# Altium PCB 600米舵机电容板V1.0.PcbDoc
Units mm, origin at the board's own origin, x right, y up, seen from the top; angles counter-clockwise.
Board outline 21.34 x 23.24 mm, 2 copper layers (Top Layer, Bottom Layer); 20 components, 2 nets, 46 pads, 29 vias.
Unrouted connection lines stored in the file: 18.
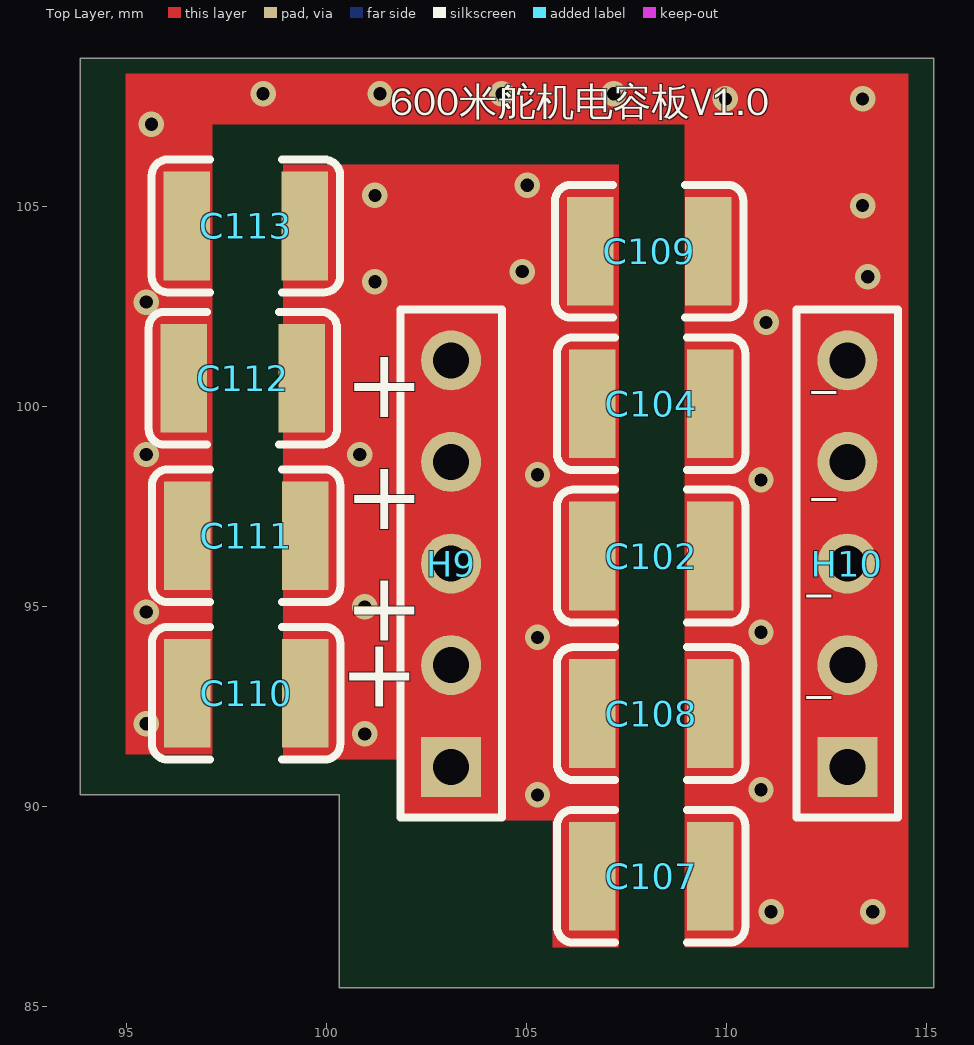
[diagram p0: Top Layer view]
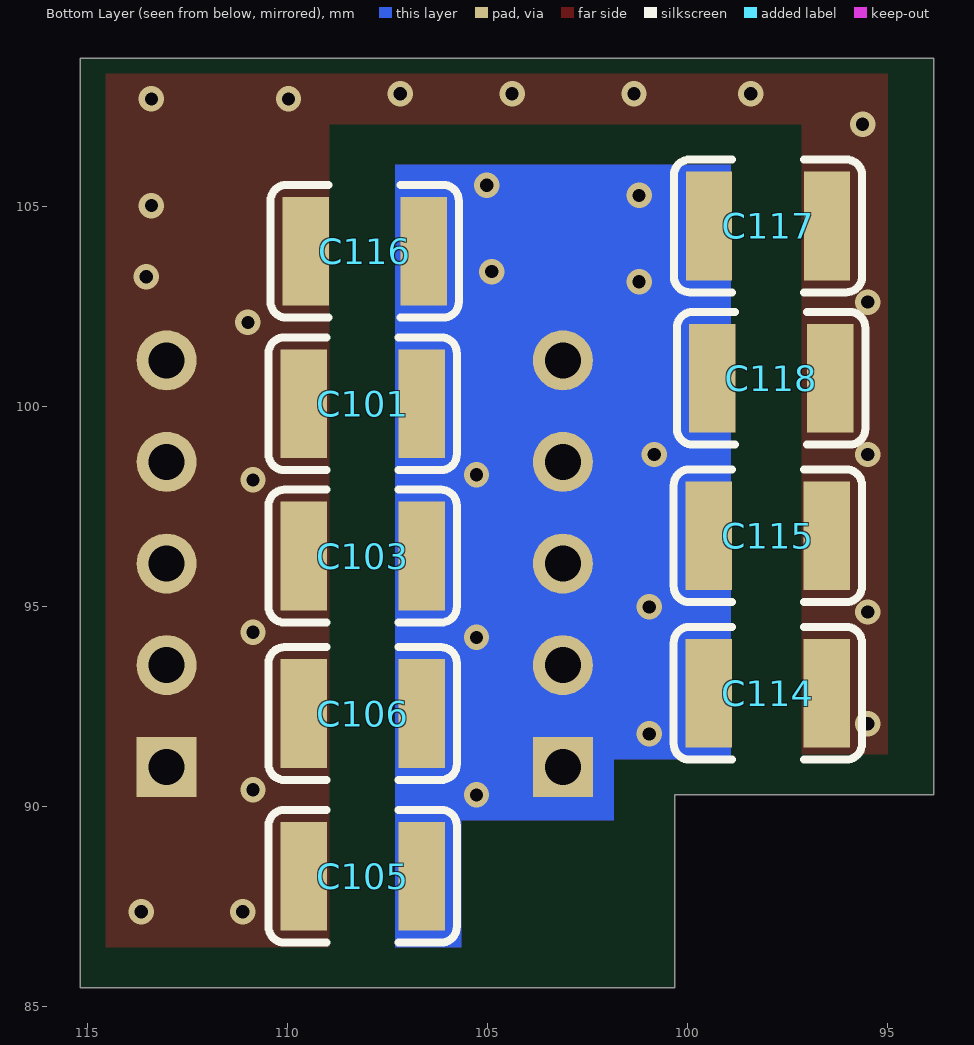
[diagram p1: Bottom Layer view, seen from below]

## Layer stack, top to bottom
Top Solder: solder mask 0.0102, Solder Resist, Dk 3.5
Top Layer: signal copper 0.0356
Dielectric 1: dielectric 0.32, FR-4, Dk 4.8
Bottom Layer: signal copper 0.0356
Bottom Solder: solder mask 0.0102, Solder Resist, Dk 3.5

## Board outline
93.853,90.297 100.33,90.297 100.33,85.471 115.189,85.471 115.189,108.712 93.853,108.712

## Design rules (kind name [scope] priority, off if disabled: settings)
Clearance 48V [(InNamedPolygon('Bottom0V') OR InNamedPolygon('BottomEncgnd') OR InNamedPolygon('Top0V') OR InNamedPolygon('TopEncgnd')) vs (InNet('24V') OR InNet('DC+') OR InNet('NetD1_1') OR InNet('NetF1_1'))] p1: gap=1.27 ignorepadtopadclearanceinfootprint=FALSE
Clearance Clearance_1 [HasFootprint('HDR-TH_40P-P1.27-V-M-R2-C20-S1.27-ISMC')] p2: gap=0.127 ignorepadtopadclearanceinfootprint=FALSE
Clearance tssop14 [HasFootprint('TSSOP-14_L5.0-W4.5-P0.65-LS6.4-BL')] p3: gap=0.01 ignorepadtopadclearanceinfootprint=TRUE
Clearance [All] p4: gap=0.254 ignorepadtopadclearanceinfootprint=FALSE
PlaneConnect [All] p1: planeconnectstyle=Direct reliefexpansion=0.508 reliefentries=4 reliefconductorwidth=0.254 reliefairgap=0.254
PolygonConnect [All] p1: connectstyle=Direct reliefconductorwidth=0.254 reliefentries=4 polygonreliefangle="90 Angle" airgapwidth=0.254
RoutingVias [All] p1: holewidth=0.711 width=1.27 viastyle="Through Hole" minholewidth=0.711 minwidth=1.27 maxholewidth=0.711 maxwidth=1.27
SolderMaskExpansion [All] p1: expansion=0.102 istentingtop=FALSE
SupplyNets "Schematic Supply Nets_9" [InNet('DC+')] p1: voltage=0.000
SupplyNets "Schematic Supply Nets_7" [InNet('0V')] p2: voltage=0.000
Width 5mil [(InNet('Encoder_5V') OR InNet('Encoder_GND') OR InNet('Encoder_CLK+') OR InNet('Encoder_CLK-') OR InNet('Encoder_D+') OR InNet('Encoder_D-') OR InNet('DI_RET') OR InNet('USB_D+') OR InNet('USB_D-') OR InNet('USB_VBUS') OR InNet('USB_GND'))] p1: maxlimit=0.762 minlimit=0.127 preferedwidth=0.127
Width Width_1 [All] p2: maxlimit=7.62 minlimit=0.254 preferedwidth=0.254
29 further rules are at their usual default settings.

## Components (designator, comment, footprint, x,y, rotation, side; value= is the part's Value field where it differs from the comment)
C101 "4.7uf 100V" 1210_C 108.127,100.076 r180 bottom value=4.7uF
C102 "4.7uf 100V" 1210_C 108.127,96.266 r180 top value=4.7uF
C103 "4.7uf 100V" 1210_C 108.127,96.266 r180 bottom value=4.7uF
C104 "4.7uf 100V" 1210_C 108.127,100.076 r180 top value=4.7uF
C105 "4.7uf 100V" 1210_C 108.127,88.265 r180 bottom value=4.7uF
C106 "4.7uf 100V" 1210_C 108.127,92.329 r180 bottom value=4.7uF
C107 "4.7uf 100V" 1210_C 108.127,88.265 r180 top value=4.7uF
C108 "4.7uf 100V" 1210_C 108.127,92.329 r180 top value=4.7uF
C109 "4.7uf 100V" 1210_C 108.077,103.886 r180 top value=4.7uF
C110 "4.7uf 100V" 1210_C 98,92.837 r0 top value=4.7uF
C111 "4.7uf 100V" 1210_C 98,96.774 r0 top value=4.7uF
C112 "4.7uf 100V" 1210_C 97.917,100.711 r0 top value=4.7uF
C113 "4.7uf 100V" 1210_C 97.995,104.521 r0 top value=4.7uF
C114 "4.7uf 100V" 1210_C 98,92.837 r0 bottom value=4.7uF
C115 "4.7uf 100V" 1210_C 98,96.774 r0 bottom value=4.7uF
C116 "4.7uf 100V" 1210_C 108.077,103.886 r180 bottom value=4.7uF
C117 "4.7uf 100V" 1210_C 97.995,104.521 r0 bottom value=4.7uF
C118 "4.7uf 100V" 1210_C 97.917,100.711 r0 bottom value=4.7uF
H9 "1×6插针 2.54" HDR1X5 103.124,91 r90 top locked
H10 "1×6插针 2.54" HDR1X5 113.03,91 r90 top locked

## Footprints (in the part's own frame and the unit in brackets; to place one, negate y for a bottom-side part, rotate by r counter-clockwise, add the part's x,y. Pads: shape width x height; smd on the part's side, far side on the other; paste and mask are expansions set on the pad)
1210_C [mm]
  rect 1.16x2.72 smd: 1(-1.475,0) 2(1.475,0)
  silkscreen extent -2.36,-1.66 2.35,1.66, body extent -1.6,-1.25 1.6,1.25, height 1.3
HDR1X5 [mm] "Connector; Header; 5 Position"
  rect 1.5x1.5 hole 0.9: 1(0,0)
  round 1.5 hole 0.9: 2(2.54,0) 3(5.08,0) 4(7.62,0) 5(10.16,0)
  silkscreen extent -1.27,-1.27 11.43,1.27

## Part data
C101 C102 C103 C104 C105 C106 C107 C108 C109 C110 C111 C112 C113 C114 C115 C116 C117 C118: library part "1210 4.7uf", "贴片电容", JLCPCB Part Class="Extended Part", LCSC Part Name="4.7uF ±10% 100V", Manufacturer=FH(风华), Manufacturer Part=1210B475K101NT, Temperature Coefficient=X7R, Tolerance=±10%, Voltage Rated=100V, Add into BOM=yes, Convert to PCB=yes, Datasheet=https://atta.szlcsc.com/upload/public/pdf/source/20210617/C2840282_5B7AB5BFD77495008CFAB3FC2796A0E9.pdf, Device=1210B475K101NT, Supplier=LCSC, Supplier Footprint=1210, Supplier Part=C2840282, Symbol=1210B475K101NT
H9 H10: library part "Header 5", "Header, 5-Pin", LatestRevisionDate=17-Jul-2002, LatestRevisionNote="Re-released for DXP Platform.", Publisher="Altium Limited"

## Via types
v1: diameter 0.635, hole 0.33, Top Layer to Bottom Layer, tented both sides, 29 vias

## Nets (pads, with @x,y where several pads share a name; then routed paths per layer and width w, separated by ;. In a path a pad name is that pad's centre, name@x,y a point inside that pad or via, vN(x,y) a via of type N, cw(c..) or ccw(c..) an arc to the next point about the centre after c; other vN are vias at no path point)
0V: C101.1 C102.1 C103.1 C104.1 C105.1 C106.1 C107.1 C108.1 C109.1 C110.1 C111.1 C112.1 C113.1 C114.1 C115.1 C116.1 C117.1 C118.1 H10.1 H10.2 H10.3 H10.4 H10.5
  other v1: 111.125,87.376 113.665,87.376 110.871,90.424 95.504,92.075 110.871,94.361 95.504,94.869 110.871,98.171 95.504,98.806 110.998,102.108 95.504,102.616 113.538,103.251 113.411,105.029 95.631,107.061 109.982,107.696 113.411,107.696 98.425,107.823 101.346,107.823 104.394,107.823 107.188,107.823
DC+: C101.2 C102.2 C103.2 C104.2 C105.2 C106.2 C107.2 C108.2 C109.2 C110.2 C111.2 C112.2 C113.2 C114.2 C115.2 C116.2 C117.2 C118.2 H9.1 H9.2 H9.3 H9.4 H9.5
  other v1: 105.283,90.297 100.965,91.821 105.283,94.234 100.965,94.996 105.283,98.298 100.838,98.806 101.219,103.124 104.902,103.378 101.219,105.283 105.029,105.537

## Other copper
Top Layer:
  region net 0V: 97.155,91.313 97.155,107.061 108.966,107.061 108.966,86.487 114.554,86.487 114.554,108.331 94.996,108.331 94.996,91.313
  region net DC+: 98.933,106.045 98.933,91.186 101.854,91.186 101.854,89.662 105.664,89.662 105.664,86.487 107.315,86.487 107.315,106.045
Bottom Layer:
  region net DC+: 98.933,106.045 98.933,91.186 101.854,91.186 101.854,89.662 105.664,89.662 105.664,86.487 107.315,86.487 107.315,106.045

## Silkscreen, mask and mechanical layers (free items; w line width, h text height)
Top Overlay:
  text "600米舵机电容板V1.0" at 101.6,107.045 h1.2
  text "-" at 112.014,99.183 h3
  text "+" at 100.451,99.161 h3
  text "-" at 112.014,96.516 h3
  text "+" at 100.451,96.367 h3
  text "-" at 111.887,94.103 h3
  text "+" at 100.451,93.573 h3
  text "+" at 100.324,91.922 h3
  text "-" at 111.887,91.563 h3
Mechanical 1:
  the board outline again, w0.01